# Altium PCB PCB2.PcbDoc
Units mil, origin at the board's own origin, x right, y up, seen from the top; angles counter-clockwise.
Board outline 1920 x 2930 mil, 2 copper layers (Top Layer, Bottom Layer); 24 components, 26 nets, 175 pads, 3 vias.
Unrouted connection lines stored in the file: 2.
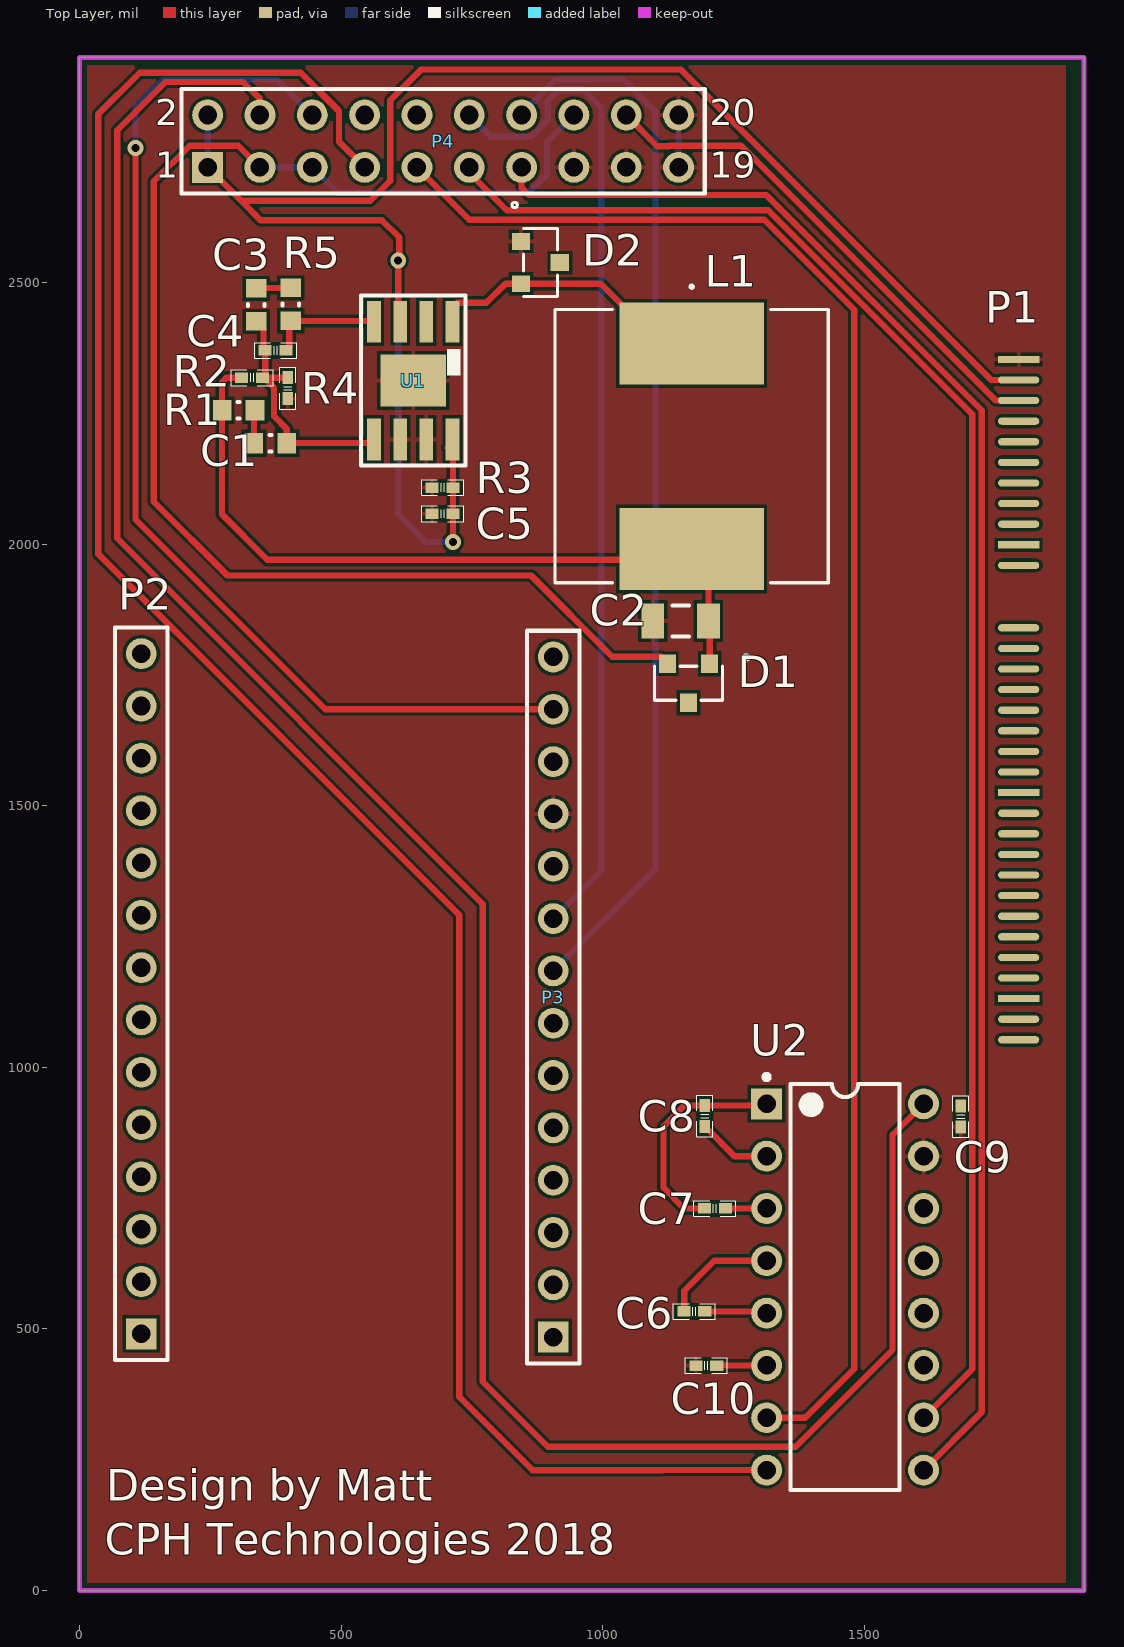
[diagram p0: Top Layer view]
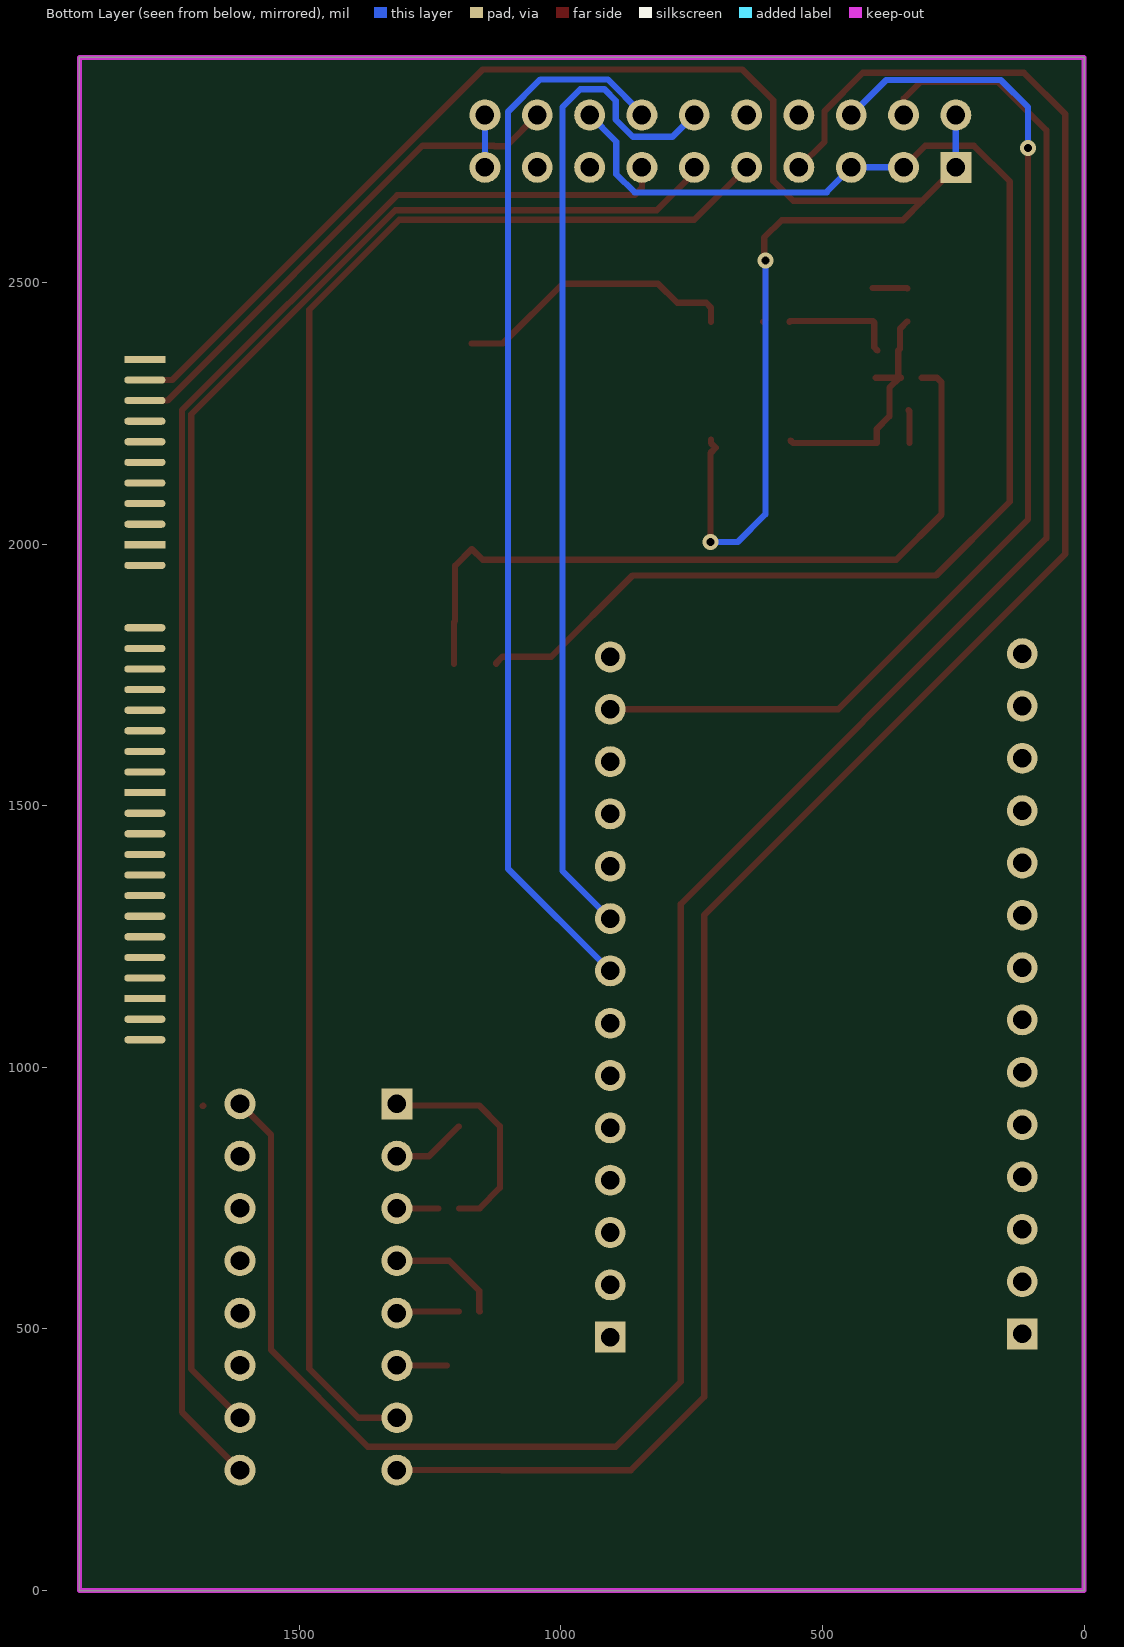
[diagram p1: Bottom Layer view, seen from below]

## Layer stack, top to bottom
Top Solder: solder mask 0.4, Solder Resist, Dk 3.5
Top Layer: signal copper 1.4
Dielectric 1: dielectric 12.6, FR-4, Dk 4.8
Bottom Layer: signal copper 1.4
Bottom Solder: solder mask 0.4, Solder Resist, Dk 3.5

## Board outline
0,0 1920,0 1920,2930 0,2930

## Design rules (kind name [scope] priority, off if disabled: settings)
BoardOutlineClearance [All] p1: gap=15 ignorepadtopadclearanceinfootprint=FALSE
Clearance [All] p1: gap=6 ignorepadtopadclearanceinfootprint=FALSE except(0: Arc-Hole Track-Hole SMDPad-Hole THPad-Hole Via-Hole Fill-Hole Poly-Hole Region-Hole Text-Hole)
ComponentClearance [All] p1: gap=1 collisioncheckmode=3 verticalgap=1 showdistances=FALSE
DiffPairsRouting [All] p1: maxlimit=393.7 minlimit=6 mostfreqgap=8 toplayer_minwidth=6 toplayer_maxwidth=15 toplayer_prefwidth=8 bottomlayer_minwidth=6 bottomlayer_maxwidth=15 bottomlayer_prefwidth=8 maxuncoupledlength=500
HoleSize [All] p1: absolutevalues=TRUE maxlimit=265 minlimit=13 maxpercent=80.000 minpercent=20.000
HoleToHoleClearance [All] p1: gap=10 allowstackedmicrovias=FALSE
MinimumAnnularRing [All] p1: minimumring=7
MinimumSolderMaskSliver [All] p1: minsoldermaskwidth=0
PlaneClearance [All] p1: clearance=10
PlaneConnect [All] p1: planeconnectstyle=Direct reliefexpansion=16 reliefentries=4 reliefconductorwidth=6 reliefairgap=6
PolygonConnect [All] p1: connectstyle=Relief reliefconductorwidth=8 reliefentries=4 polygonreliefangle="90 Angle" airgapwidth=6
RoutingCorners [All] p1: cornerstyle=45-Degree minsetback=49.21 maxsetback=49.21
RoutingVias [All] p1: holewidth=15 width=30 viastyle="Through Hole" minholewidth=13 minwidth=27 maxholewidth=100 maxwidth=114
SilkToSilkClearance [All] p1: silktosilkclearance=0
SilkToSolderMaskClearance [IsPad] p1: minsilkscreentomaskgap=6 clearancetoexposedcopper=TRUE
SolderMaskExpansion [All] p1: expansion=2.95
Width [All] p1: maxlimit=400 minlimit=6 preferedwidth=8
20 further rules are at their usual default settings.

## Classes and differential pairs
component class BoardPower: C1 C2 C3 C4 C5 D1 D2 L1 P1 R1 R2 R3 R4 R5 U1
component class Master: P2 P3
component class Serial: C6 C7 C8 C9 C10 U2

## Components (designator, comment, footprint, x,y, rotation, side; value= is the part's Value field where it differs from the comment)
C1 "CAP_2" 0603 365,2193 r0 top value=4.7nF
C2 "Cap" C1206 1149,1853 r0 top value=22uF
C3 "CAP_1_17" 0603 338,2457 r270 top value=15nF
C4 "CAP_1_16" 0402 375,2370 r180 top value=150pF
C5 "CAP_1_21_3" 0402 694,2058 r0 top value=1uF
C6 "CAP_1_21_4" 0402 1175.1,533.36 r0 top value=1uF
C7 "CAP_1_21_4" 0402 1214.47,730.21 r0 top value=1uF
C8 "CAP_1_21_4" 0402 1195.1,907.06 r270 top value=1uF
C9 "CAP_1_21_4" 0402 1684.21,906 r90 top value=1uF
C10 "CAP_1_21_4" 0402 1198,430 r0 top value=1uF
D1 "SCHOTTKY DIODE" SOT-23 1164,1734 r180 top
D2 "SCHOTTKY DIODE" SOT-23 881,2538 r270 top
L1 "INDUCTOR" IND_BOURNS_SRR12 1170,2187 r270 top value=27uH
P1 "PCIE-064-02-F-D-EMS2_1" PCIE-064-02-F-D-EMS2 1795,2353 r270 top
P2 "Header 14" HDR1X14 118.11,490.55 r90 top
P3 "Header 14" HDR1X14 905.51,484.25 r90 top
P4 "Header 10X2" HDR2X10 245,2720 r0 top
R1 "RES_9" 0603 304,2256 r180 top value=100
R2 "RES_38" 0402 330,2318 r180 top value=4.99K
R3 "RES_11" 0402 694,2108 r180 top value=100K
R4 "RES_49" 0402 398,2298 r90 top value=680
R5 "RES_32" 0603 404,2458 r90 top value=3.4k
U1 "L7986ATR" L7986ATR 637.97,2312.46 r270 top
U2 "MAX232N" N0016A 1463.21,580.21 r0 top

## Footprints (in the part's own frame and the unit in brackets; to place one, negate y for a bottom-side part, rotate by r counter-clockwise, add the part's x,y. Pads: shape width x height; smd on the part's side, far side on the other; paste and mask are expansions set on the pad)
0402 [mil] "0402"
  rect 25x20 smd mask+2: 1(-20,0) 2(20,0)
  silkscreen extent -40,-15 40,15, body extent -20,-10 20,10, height 16
0603 [mm] "Body 1.6x0.8mm, Height 0.55mm, IPC Medium Density"
  rect 0.9x1 smd: 1(-0.8,0) 2(0.8,0)
  silkscreen extent -0.05,-0.4 0.05,0.4, body extent -0.87,-0.48 0.88,0.47, height 0.55
C1206 [mm] "Chip Capacitor, Body 3.2x1.6mm, IPC High Density"
  rect 1.1x1.7 smd: 1(-1.35,0) 2(1.35,0)
  silkscreen extent -0.4,-0.75 0.4,0.75, body extent -1.7,-0.9 1.7,0.9, height 1.3
HDR1X14 [mm] "Connector; Header; 14 Position"
  rect 1.5x1.5 hole 0.9: 1(0,0)
  round 1.5 hole 0.9: 2(2.54,0) 3(5.08,0) 4(7.62,0) 5(10.16,0) 6(12.7,0) 7(15.24,0) 8(17.78,0) 9(20.32,0) 10(22.86,0) 11(25.4,0) 12(27.94,0) 13(30.48,0) 14(33.02,0)
  silkscreen extent -1.27,-1.27 34.29,1.27
HDR2X10 [mm] "Connector; Header; 10x2 Position"
  rect 1.5x1.5 hole 0.9: 1(0,0)
  round 1.5 hole 0.9: 2(0,2.54) 3(2.54,0) 4(2.54,2.54) 5(5.08,0) 6(5.08,2.54) 7(7.62,0) 8(7.62,2.54) 9(10.16,0) 10(10.16,2.54) 11(12.7,0) 12(12.7,2.54) 13(15.24,0) 14(15.24,2.54) 15(17.78,0) 16(17.78,2.54) 17(20.32,0) 18(20.32,2.54) 19(22.86,0) 20(22.86,2.54)
  silkscreen extent -1.27,-1.27 24.13,3.81
IND_BOURNS_SRR12 [mil]
  rect 157x276 smd paste+0 mask+0: 1(-196.5,0) 2(196.5,0)
  silkscreen extent -308,-261 261,261, body extent 0,0 10,10, height 10
L7986ATR [mil] "L7986ATR"
  rect 80x26 smd: 1(-112.5,75) 2(-112.5,25) 3(-112.5,-25) 4(-112.5,-75) 5(112.46,-74.97) 6(112.46,-24.97) 7(112.46,25.03) 8(112.46,75.03)
  rect 100x126 smd paste-1000: 9(0,0)
  silkscreen extent -163,-100 162,100, body extent -151,-98 151,98, height 85
N0016A [mm] "DIP, 16-Leads, Body 19.7x6.6mm, Pitch 2.54mm"
  rect 1.5x1.5 hole 0.9: 1(-3.81,8.89)
  round 1.5 hole 0.9: 2(-3.81,6.35) 3(-3.81,3.81) 4(-3.81,1.27) 5(-3.81,-1.27) 6(-3.81,-3.81) 7(-3.81,-6.35) 8(-3.81,-8.89) 9(3.81,-8.89) 10(3.81,-6.35) 11(3.81,-3.81) 12(3.81,-1.27) 13(3.81,1.27) 14(3.81,3.81) 15(3.81,6.35) 16(3.81,8.89)
  silkscreen extent -3.93,-9.85 2.65,10.31, body extent -3.95,-9.85 3.95,9.85, height 5.08
PCIE-064-02-F-D-EMS2 [mm]
  rect 0.35x2 smd: A1(0,0) A10(9,0) A20(21.032,0) A30(31.032,0)
  oval 0.35x2 smd: A2(1,0) A3(2,0) A4(3,0) A5(4,0) A6(5,0) A7(6,0) A8(7,0) A9(8,0) A11(10,0) A12(13.032,0) A13(14.032,0) A14(15.032,0) A15(16.032,0) A16(17.032,0) A17(18.032,0) A18(19.032,0) A19(20.032,0) A21(22.032,0) A22(23.032,0) A23(24.032,0) A24(25.032,0) A25(26.032,0) A26(27.032,0) A27(28.032,0) A28(29.032,0) A29(30.032,0) A31(32.032,0) A32(33.032,0)
  rect 0.35x2 smd far side: B1(0,0) B10(9,0) B20(21.032,0) B30(31.032,0)
  oval 0.35x2 smd far side: B2(1,0) B3(2,0) B4(3,0) B5(4,0) B6(5,0) B7(6,0) B8(7,0) B9(8,0) B11(10,0) B12(13.032,0) B13(14.032,0) B14(15.032,0) B15(16.032,0) B16(17.032,0) B17(18.032,0) B18(19.032,0) B19(20.032,0) B21(22.032,0) B22(23.032,0) B23(24.032,0) B24(25.032,0) B25(26.032,0) B26(27.032,0) B27(28.032,0) B28(29.032,0) B29(30.032,0) B31(32.032,0) B32(33.032,0)
SOT-23 [mil]
  rect 32x35 smd paste+0 mask+0: 1(-40.35,-37.2) 2(40.35,-37.2) 3(0,37.2)
  silkscreen extent -115,-54 65,33, body extent 0,0 10,10, height 10

## Part data
C1: "4.7nF 10% 50V", Capacitance=4.7nF, Case/Package=0603, Case Code (Metric)=1608, Dielectric=C0G, Manufacturer=Samsung, Manufacturer Part Number=CL10B472KB8NNNC, Max Operating Temperature=125°C, Min Operating Temperature=-55°C, Supplier Part Number 1=1276-1098-1-ND, Tolerance=10%, Voltage=50V, Case Code (Imperial)=0603, ComponentLink1Description=https://www.verical.com/server-webapp/html/getDatasheet?partID=359559, ComponentLink1URL=https://www.verical.com/server-webapp/html/getDatasheet?partID=359559, ComponentLink2Description=https://media.digikey.com/pdf/Data%20Sheets/Samsung%20PDFs/CL_Series_MLCC_ds.pdf, ComponentLink2URL=https://media.digikey.com/pdf/Data%20Sheets/Samsung%20PDFs/CL_Series_MLCC_ds.pdf, ComponentLink3Description=http://www1.futureelectronics.com/doc/SAMSUNG%20PASSIVE/CL05B104KQ5NNNC.pdf, ComponentLink3URL=http://www1.futureelectronics.com/doc/SAMSUNG%20PASSIVE/CL05B104KQ5NNNC.pdf, ComponentLink4Description=https://www.distrelec.biz/Web/Downloads/_e/ng/MLCC_CatalogDownload2013_ENG.pdf?mime=application%2Fpdf, ComponentLink4URL=https://www.distrelec.biz/Web/Downloads/_e/ng/MLCC_CatalogDownload2013_ENG.pdf?mime=application%2Fpdf, ComponentLink5Description=https://produktinfo.conrad.com/datenblaetter/450000-474999/457744-da-01-en-VS_KONDENSATOR_0603.pdf, ComponentLink5URL=https://produktinfo.conrad.com/datenblaetter/450000-474999/457744-da-01-en-VS_KONDENSATOR_0603.pdf, Contact Plating=Tin, Depth=0.8mm, Height=0.8mm, Lead Free="Lead Free", Length=1.6mm, Material=Ceramic, Mount="Surface Mount", Packaging="Tape and Reel", Pricing 1="1=0.1, 10=0.036, 100=0.0162, 500=0.01156, 1000=0.00908 (USD)", Radiation Hardening=No, Stock 1=40000, Supplier 1=Digi-Key, Thickness=0.035inch, Voltage Rating=50V, Voltage Rating (DC)=50V, Width=0.031inch
C2: "Capacitor", Capacitance=22uF, Case/Package=1206, Case Code (Metric)=3216, Dielectric Material=Ceramic, Manufacturer=TDK, Manufacturer Part Number=C3216JB1V226M160AC, Max Operating Temperature=85°C, Min Operating Temperature=-25°C, Package Quantity=2000, Supplier Part Number 1=445-11739-1-ND, Tolerance=20%, Voltage Rating=35V, Case Code (Imperial)=1206, Composition=Ceramic, Height=1.6mm, LatestRevisionDate=17-Jul-2002, LatestRevisionNote="Re-released for DXP Platform.", Lead Free="Lead Free", Length=0.126inch, Mount="Surface Mount", PackageDescription="Radial Cap, Thru-Hole; 2 Leads; 0.3 in Pin Spacing", PackageReference=RAD-0.3, Packaging="Tape and Reel", Pricing 1="1 = 1.20000, 10 = 0.94900, 100 = 0.71160, 500 = 0.53762, 1000 = 0.47438 (USD)", Published=8-Jun-2000, Publisher="Altium Limited", RoHS=Yes, Stock 1=587, Supplier 1=Digi-Key, Termination=SMD/SMT, Thickness=0.069inch, Voltage Rating (DC)=35V, Width=0.063inch
C3: "15nF 10% 50V", Capacitance=12nF, Case/Package=0603, Case Code (Metric)=1608, Dielectric=X7R, Dielectric Material=Ceramic, Manufacturer=KEMET, Manufacturer Part Number=C0603C123K1RACTU, Max Operating Temperature=125°C, Min Operating Temperature=-55°C, Package Quantity=1, Supplier Part Number 1=399-3473-1-ND, Tolerance=10%, Voltage=50V, Voltage Rating=100V, Case Code (Imperial)=0603, Depth=0.8mm, Height=0.8mm, Length=1.6mm, Mount="Surface Mount", Packaging="Tape and Reel", Pricing 1="1=0.39, 10=0.27, 100=0.1617, 500=0.1213, 1000=0.10243 (USD)", Stock 1=40000, Supplier 1=Digi-Key, Termination=SMD/SMT, Thickness=0.034inch, Voltage Rating (DC)=100V, Width=0.8mm
C4: "150pF 5% 50V", Manufacturer="AVX Corporation", Manufacturer Part Number=04025A151JAT2A, Operating Temperature="-55°C ~ 125°C", Package / Case="0402 (1005 Metric)", Ratings=-, Supplier Part Number 1=478-1084-1-ND, Temperature Coefficient="C0G, NP0", Tolerance=±5%, Voltage - Rated=50V, Applications="General Purpose", Category=Capacitors, ComponentLink1Description=http://datasheets.avx.com/C0GNP0-Dielectric.pdf, ComponentLink1URL=http://datasheets.avx.com/C0GNP0-Dielectric.pdf, Features=-, Height - Seated (Max)=-, Lead Spacing=-, Lead Style=-, Mounting Type="Surface Mount, MLCC", Notification="Current market demand for these product types have resulted in fluctuating and extending lead times. Lead times may differ.", Packaging="Cut Tape (CT)", Part Status=Active, Pricing 1="1=0.19, 10=0.133, 100=0.0625, 500=0.04384, 1000=0.0363, 2500=0.03378, 5000=0.03091 (USD)", RoHS="RoHS Compliant", Size / Dimension="0.039\" L x 0.020\" W (1.00mm x 0.50mm)", Stock 1=55500, Supplier 1=Digi-Key, Thickness (Max)="0.022\" (0.56mm)"
C5: "1uF 10% 50V", Manufacturer="Samsung Electro-Mechanics", Manufacturer Part Number=CL05A105KA5NQNC, Operating Temperature="-55°C ~ 85°C", Package / Case="0402 (1005 Metric)", Ratings=-, Supplier Part Number 1=1276-1445-1-ND, Temperature Coefficient=X5R, Tolerance=±10%, Voltage - Rated=25V, Applications="General Purpose", Category=Capacitors, ComponentLink1Description=http://www.samsungsem.com/kr/support/product-search/mlcc/CL05A105KA5NQNC.jsp, ComponentLink1URL=http://www.samsungsem.com/kr/support/product-search/mlcc/CL05A105KA5NQNC.jsp, Features=-, Height - Seated (Max)=-, Lead Spacing=-, Lead Style=-, Mounting Type="Surface Mount, MLCC", Notification="Current market demand for these product types have resulted in fluctuating and extending lead times. Lead times may differ.", Packaging="Cut Tape (CT)", Part Status=Active, Pricing 1="1=0.33, 10=0.222, 100=0.1151, 500=0.08052, 1000=0.07188, 2500=0.069, 5000=0.06325 (USD)", RoHS="RoHS Compliant", Size / Dimension="0.039\" L x 0.020\" W (1.00mm x 0.50mm)", Stock 1=47496, Supplier 1=Digi-Key, Thickness (Max)="0.022\" (0.55mm)"
C6 C7 C8 C9 C10: "1uF 10% 10V", Capacitance=1uF, Case/Package=0402, Case Code (Metric)=1005, Dielectric=X5R, Manufacturer=Samsung, Manufacturer Part Number=CL05A105MP5NNNC, Max Operating Temperature=85°C, Min Operating Temperature=-55°C, Package Quantity=1, Supplier Part Number 1=1276-1448-1-ND, Tolerance=10%, Voltage=10V, Case Code (Imperial)=0402, ComponentLink1Description=https://media.digikey.com/pdf/Data%20Sheets/Samsung%20PDFs/CL_Series_MLCC_ds.pdf, ComponentLink1URL=https://media.digikey.com/pdf/Data%20Sheets/Samsung%20PDFs/CL_Series_MLCC_ds.pdf, Depth=0.5mm, Height=0.5mm, Lead Free="Lead Free", Length=1mm, Mount="Surface Mount", Packaging="Tape and Reel", Pricing 1="1=0.1, 10=0.031, 100=0.014, 500=0.01002, 1000=0.00787, 2500=0.00716, 5000=0.00658 (USD)", Radiation Hardening=No, Stock 1=100000, Supplier 1=Digi-Key, Thickness=0.022inch, Voltage Rating=10V, Voltage Rating (DC)=10V, Width=0.02inch
D1 D2: Average Rectified Current=200mA, Capacitance=10pF, Case/Package=SOT, Forward Voltage=800mV, Manufacturer=Diodes, Manufacturer Part Number=BAT54-7-F, Max Forward Surge Current (Ifsm)=600mA, Max Operating Temperature=150°C, Max Power Dissipation=200mW, Max Repetitive Reverse Voltage (Vrrm)=30V, Max Reverse Leakage Current=100uA, Max Surge Current=75A, Min Operating Temperature=-65°C, Package Quantity=3000, Peak Reverse Current=2uA, Supplier Part Number 1=BAT54-FDICT-ND, ComponentLink1Description=http://www.jameco.com/Jameco/Products/ProdDS/1539180.pdf, ComponentLink1URL=http://www.jameco.com/Jameco/Products/ProdDS/1539180.pdf, ComponentLink2Description=https://www.verical.com/server-webapp/html/getDatasheet?partID=141352, ComponentLink2URL=https://www.verical.com/server-webapp/html/getDatasheet?partID=141352, ComponentLink3Description=http://www.st.com/web/en/resource/technical/document/datasheet/CD00002082.pdf, ComponentLink3URL=http://www.st.com/web/en/resource/technical/document/datasheet/CD00002082.pdf, ComponentLink4Description=http://www.st.com/content/ccc/resource/technical/document/datasheet/group1/48/52/98/4d/1d/c7/40/65/CD00002082/files/CD00002082.pdf/jcr:content/translations/en.CD00002082.pdf, ComponentLink4URL=http://www.st.com/content/ccc/resource/technical/document/datasheet/group1/48/52/98/4d/1d/c7/40/65/CD00002082/files/CD00002082.pdf/jcr:content/translations/en.CD00002082.pdf, ComponentLink5Description=http://www.st.com/st-web-ui/static/active/en/resource/technical/document/datasheet/CD00002082.pdf, ComponentLink5URL=http://www.st.com/st-web-ui/static/active/en/resource/technical/document/datasheet/CD00002082.pdf, ComponentLink6Description=http://datasheet.iiic.cc/stmicroelectronics/STPS3L40S.pdf, ComponentLink6URL=http://datasheet.iiic.cc/stmicroelectronics/STPS3L40S.pdf, Contact Plating=Matte,Tin, Current Rating=200mA, Element Configuration=Single, Forward Current=200mA, Height=1mm, Lead Free="Lead Free", Length=2.9mm, Max Reverse Voltage (DC)=30V, Mount="Surface Mount", Number of Pins=3, Output Current=200mA, Packaging="Tape and Reel", Peak Non-Repetitive Surge Current=600mA, Polarity=Standard, Power Dissipation=200mW, Power Rating=200mW, Pricing 1="1=0.13, 10=0.117, 100=0.0634, 500=0.03904, 1000=0.02662 (GBP)", Pricing 2="1=0.84, 10=0.742, 100=0.5689, 500=0.4497, 1000=0.35976 (USD)", Radiation Hardening=No, REACH SVHC="No SVHC", Reverse Recovery Time=5ns, Stock 1=396335, Stock 2=24, Supplier 1=Digi-Key, Supplier 2=Digi-Key, Supplier Part Number 2=497-4673-1-ND, Termination=SMD/SMT, Voltage Rating (DC)=30V, Weight=0.000282oz, Width=1.3mm
L1: library part Inductor, "Inductor", Case/Package=Nonstandard, Current Rating=3A, DC Resistance (DCR)=48mR, Frequency=6.5MHz, Inductance=27uh, Inductance Tolerance=20%, Manufacturer=Bourns, Manufacturer Part Number=SRR1208-270ML, Max Operating Temperature=125°C, Min Operating Temperature=-40°C, Package Quantity=400, Resistance=48MR, Saturation Current=4.3A, Supplier Part Number 1=SRR1208-270MLCT-ND, Test Frequency=1kHz, Code_IEC=1005, Code_JEITA=0402, ComponentLink1Description=https://www.bourns.com/docs/Product-Datasheets/SRR1208.pdf, ComponentLink1URL=https://www.bourns.com/docs/Product-Datasheets/SRR1208.pdf, ComponentLink2Description=http://www.bourns.com/pdfs/srr1208.pdf, ComponentLink2URL=http://www.bourns.com/pdfs/srr1208.pdf, ComponentLink3Description=http://www.farnell.com/datasheets/1483756.pdf, ComponentLink3URL=http://www.farnell.com/datasheets/1483756.pdf, ComponentLink4Description=http://www.mouser.com/ds/2/54/rr1208-777886.pdf, ComponentLink4URL=http://www.mouser.com/ds/2/54/rr1208-777886.pdf, ComponentLink5Description=http://www.produktinfo.conrad.com/datenblaetter/1000000-1099999/001056595-da-01-en-MAG_ABGE_L_IND_SRR1208_270ML_27UH_20_.pdf, ComponentLink5URL=http://www.produktinfo.conrad.com/datenblaetter/1000000-1099999/001056595-da-01-en-MAG_ABGE_L_IND_SRR1208_270ML_27UH_20_.pdf, Composition=Wirewound, Core Material=Ferrite, DC Current=3A, Depth=13mm, Height=8.5mm, Height - Seated (Max)=0.335inch, LatestRevisionDate=29-May-2009, LatestRevisionNote="IPC-7351 Footprint Added.", Length=12.7mm, Material=Steel, Max DC Current=3A, Military Standard=Not, Mount="Surface Mount", PackageDescription="Chip Inductor", PackageReference=0402-A, Packaging="Tape and Reel", Pricing 1="1 = 1.13000, 10 = 1.04700, 100 = 0.75670 (USD)", Published=8-Jun-2000, Publisher="Altium Limited", Q Factor=23, Radiation Hardening=No, REACH SVHC="No SVHC", RMS Current (Irms)=3A, RoHS=Yes, Self Resonant Frequency=6.5MHz, Shielding=Shielded, Stock 1=16310, Supplier 1=Digi-Key, Termination=SMD/SMT, Tolerance=20%, Width=12.7mm
P2 P3: "Header, 14-Pin", LatestRevisionDate=17-Jul-2002, LatestRevisionNote="Re-released for DXP Platform.", Publisher="Altium Limited"
P4: "Header, 10-Pin, Dual row", LatestRevisionDate=17-Jul-2002, LatestRevisionNote="Re-released for DXP Platform.", Publisher="Altium Limited"
R1: "RES 100 0.1W ±1% 0603 (1608)", Manufacturer="Panasonic Electronic Components", Manufacturer Part Number=ERA-3AEB101V, Operating Temperature="-55°C ~ 155°C", Package / Case="0603 (1608 Metric)", Power (Watts)="0.1W, 1/10W", Supplier Device Package=0603, Supplier Part Number 1=P100DBCT-ND, Temperature Coefficient=±25ppm/°C, Tolerance=±0.1%, Category=Resistors, ComponentLink1Description=https://industrial.panasonic.com/cdbs/www-data/pdf/RDM0000/AOA0000C307.pdf, ComponentLink1URL=https://industrial.panasonic.com/cdbs/www-data/pdf/RDM0000/AOA0000C307.pdf, Composition="Thin Film", Failure Rate=-, Features="Automotive AEC-Q200", Height - Seated (Max)="0.022\" (0.55mm)", Packaging="Cut Tape (CT)", Part Status=Active, Pricing 1="1=0.35, 10=0.3, 100=0.1172, 1000=0.04906, 2500=0.04498 (USD)", RoHS="RoHS Compliant", Size / Dimension="0.063\" L x 0.031\" W (1.60mm x 0.80mm)", Stock 1=413728, Supplier 1=Digi-Key
R2: "RES 4.99K ±1% 0603 (1608)", Manufacturer="Panasonic Electronic Components", Manufacturer Part Number=ERA-2AEB4991X, Operating Temperature="-55°C ~ 155°C", Package / Case="0402 (1005 Metric)", Power (Watts)="0.063W, 1/16W", Supplier Device Package=0402, Supplier Part Number 1=P4.99KDCCT-ND, Temperature Coefficient=±25ppm/°C, Tolerance=±0.1%, Category=Resistors, ComponentLink1Description=https://industrial.panasonic.com/cdbs/www-data/pdf/RDM0000/AOA0000C307.pdf, ComponentLink1URL=https://industrial.panasonic.com/cdbs/www-data/pdf/RDM0000/AOA0000C307.pdf, Composition="Thin Film", Failure Rate=-, Features="Automotive AEC-Q200", Height - Seated (Max)="0.016\" (0.40mm)", Packaging="Cut Tape (CT)", Part Status=Active, Pricing 1="1=0.45, 10=0.321, 100=0.1283, 1000=0.06322, 2500=0.05858, 5000=0.053 (USD)", RoHS="RoHS Compliant", Size / Dimension="0.039\" L x 0.020\" W (1.00mm x 0.50mm)", Stock 1=434290, Supplier 1=Digi-Key
R3: "RES 100K 0.1W ±1% 0603 (1608 Metric)", Manufacturer="Vishay Dale", Manufacturer Part Number=TNPW0402100KBEED, Operating Temperature="-55°C ~ 155°C", Package / Case="0402 (1005 Metric)", Power (Watts)="0.1W, 1/10W", Supplier Device Package=0402, Supplier Part Number 1=TNP100KDACT-ND, Temperature Coefficient=±25ppm/°C, Tolerance=±0.1%, Category=Resistors, ComponentLink1Description=http://www.vishay.com/docs/28758/tnpw_e3.pdf, ComponentLink1URL=http://www.vishay.com/docs/28758/tnpw_e3.pdf, Composition="Thin Film", Failure Rate=-, Features="Anti-Sulfur, Automotive AEC-Q200, Moisture Resistant", Height - Seated (Max)="0.016\" (0.40mm)", Packaging="Cut Tape (CT)", Part Status=Active, Pricing 1="1=0.65, 10=0.462, 100=0.2402, 1000=0.12936, 2500=0.1276 (USD)", RoHS="RoHS Compliant", Size / Dimension="0.039\" L x 0.020\" W (1.00mm x 0.50mm)", Stock 1=177054, Supplier 1=Digi-Key
R4: "RES 680 ±1% 0603 (1608)", Manufacturer="Panasonic Electronic Components", Manufacturer Part Number=ERA-2AED681X, Operating Temperature="-55°C ~ 155°C", Package / Case="0402 (1005 Metric)", Power (Watts)="0.063W, 1/16W", Supplier Device Package=0402, Supplier Part Number 1=P680DECT-ND, Temperature Coefficient=±25ppm/°C, Tolerance=±0.5%, Category=Resistors, ComponentLink1Description=https://industrial.panasonic.com/cdbs/www-data/pdf/RDM0000/AOA0000C307.pdf, ComponentLink1URL=https://industrial.panasonic.com/cdbs/www-data/pdf/RDM0000/AOA0000C307.pdf, Composition="Thin Film", Failure Rate=-, Features="Automotive AEC-Q200", Height - Seated (Max)="0.016\" (0.40mm)", Packaging="Cut Tape (CT)", Part Status=Active, Pricing 1="1=0.22, 10=0.188, 100=0.0735, 1000=0.03077, 2500=0.0282, 5000=0.02564 (USD)", RoHS="RoHS Compliant", Size / Dimension="0.039\" L x 0.020\" W (1.00mm x 0.50mm)", Stock 1=23860, Supplier 1=Digi-Key
R5: "RES 3.4K ±1% 0603 (1608)", Case/Package=0603, Case Code (Metric)=1608, Manufacturer=Panasonic, Manufacturer Part Number=ERA3AEB3401V, Max Operating Temperature=155°C, Max Power Dissipation=100mW, Min Operating Temperature=-55°C, Package Quantity=1, Resistance=3.4kR, Supplier Part Number 1=P3.4KDBCT-ND, Temperature Coefficient=25ppm/°C, Voltage Rating=75V, Case Code (Imperial)=0603, ComponentLink1Description=http://uk.rs-online.com/webdocs/0eb1/0900766b80eb1d8c.pdf, ComponentLink1URL=http://uk.rs-online.com/webdocs/0eb1/0900766b80eb1d8c.pdf, ComponentLink2Description=http://industrial.panasonic.com/www-data/pdf/AOA0000/AOA0000CE26.pdf, ComponentLink2URL=http://industrial.panasonic.com/www-data/pdf/AOA0000/AOA0000CE26.pdf, ComponentLink3Description=http://www.farnell.com/datasheets/485442.pdf, ComponentLink3URL=http://www.farnell.com/datasheets/485442.pdf, Composition="Metal Film,Thin Film", Contact Plating=Tin, Depth=0.8mm, Features="Automotive AEC-Q200", Height=0.45mm, Lead Free="Lead Free", Length=1.6mm, Military Standard=Not, Mount="Surface Mount", Number of Pins=2, Number of Terminations=2, Packaging="Tape and Reel", Power Rating=100mW, Pricing 1="1=0.35, 10=0.3, 100=0.1172, 1000=0.04906, 2500=0.04498 (USD)", Radiation Hardening=No, REACH SVHC="No SVHC", Stock 1=33449, Supplier 1=Digi-Key, Voltage Rating (DC)=75V, Width=0.8mm
U1: "IC Switching Regulator 3A STEP-DOWN 8-HSOP", Supplier Part Number 1=497-12083-1-ND, Supplier 1=Digi-Key, Title=L7986TATR
U2: library part CMP-0299-00084-2, "Dual EIA-232 Driver / Receiver, 0 to 70 degC, 16-Pin PDIP (N), Pb-Free (RoHS)", Drivers Per Package=2, Supply Voltage(s)(V)=5, ComponentLink1Description="Manufacturer URL", ComponentLink1URL=www.ti.com, ComponentLink2Description=Datasheet, ComponentLink2URL=http://www.ti.com/general/docs/lit/getliterature.tsp?genericPartNumber=MAX232&fileType=pdf, ComponentLink3Description="Package Specification", ComponentLink3URL=http://www.ti.com/litv/pdf/mpdi002c, DatasheetVersion=SLLS047L, ESD HBM(kV)=+/-2, ICC(Max)(mA)=10, PackageDescription="16-Pin Plastic Dual-In-Line Package, Row Spacing 7.62 mm, Pitch 2.54 mm", PackageReference=N0016A, PackageVersion="revE, Dec-2002", Receivers Per Package=2, RS-232=TRUE, Single Supply=TRUE, SubFamily=RS-232

## Via types
v1: diameter 30, hole 15, Top Layer to Bottom Layer, 3 vias

## Nets (pads, with @x,y where several pads share a name; then routed paths per layer and width w, separated by ;. In a path a pad name is that pad's centre, name@x,y a point inside that pad or via, vN(x,y) a via of type N, cw(c..) or ccw(c..) an arc to the next point about the centre after c; other vN are vias at no path point)
GND: C2.1 C5.1 C9.1 C10.1 D2.1 P1.A1 P3.11 P4.15 P4.17 P4.19 P4.20 R3.2 R4.1 U1.6 U1.7 U1.9 U2.15 | length 100
  Bottom Layer w12: P4.19 P4.20
NetC1_1: C1.1 R1.1 | length 63.8
  Top Layer w12: C1.1 333.5,2254.01 R1.1
NetC1_2: C1.2 C3.2 C4.2 R2.1 R4.2 U1.5 | length 474.4
  Top Layer w12: C3.2 351.72,2411.79 351.72,2373.28 C4.2 355,2323 R2.1 R2.1@352.5,2318 ; R4.2 R2.1@352.5,2318 ; U1.5@561,2198 556,2193 C1.2 396,2193.5 396,2220 372,2244 372,2298.5 R2.1@352.5,2318
NetC2_2: C2.2 D1.1 L1.2 R1.2 R2.2 | length 1469.4
  Top Layer w12: R2.2 281,2318 272.5,2309.5 R1.2 272.5,2056.5 359,1970 1149.5,1970 L1.2 1202.15,1958.35 C2.2 1204.35,1850.8 D1.1
NetC3_1: C3.1 R5.2 | length 66.4
  Top Layer w12: C3.1 339,2489.5 R5.2
NetC4_1: C4.1 R5.1 U1.4 | length 219.8
  Top Layer w12: C4.1 401,2376 401,2423.5 R5.1 561.43,2426.5 U1.4
NetC5_2: C5.2 P1.A2 P4.1 P4.2 R3.1 U1.3 U1.8 | length 3426.8
  Top Layer w12: P4.1 309,2656 ; U1.3 609,2428.94 v1(609,2542) 611,2544 611,2586 578,2619 346,2619 309,2656 ; U1.8 713,2193 704,2184 714,2174 R3.1 C5.2 v1(714,2004) ; P1.A2 1742.37,2313.63 1149,2907 653,2907 594,2848 594,2694 556,2656 309,2656
  Bottom Layer w12: P4.1 P4.2 ; v1(609,2542) 609,2057 662,2004 v1(714,2004)
NetC6_1: C6.1 U2.4 | length 220.9
  Top Layer w12: C6.1 1155.73,533.99 1155.73,572.73 1213.21,630.21 U2.4
NetC6_2: C6.2 U2.5 | length 119.4
  Top Layer w12: C6.2 1310.06,533.36 U2.5
NetC7_1: C7.1 C8.1 U2.1 | length 427.4
  Top Layer w12: C7.1 1155.1,730.21 1155.1,730.84 1116.36,769.58 1116.36,887.69 1155.73,927.06 C8.1 1310.06,927.06 U2.1
NetC7_2: C7.2 U2.3 | length 78.7
  Top Layer w12: C7.2 U2.3
NetC8_2: C8.2 U2.2 | length 141.7
  Top Layer w12: C8.2 1251.95,830.21 U2.2
NetC9_2: C9.2 P4.4 U2.16 | length 4443.8
  Top Layer w12: P4.4 345,2851 313,2883 164,2883 72,2791 72,2011 771,1312 771,399 895,275 1369.06,275 1554,459.94 1554,871 U2.16 ; C9.2@1683.43,926.79 C9.2
NetC10_2: C10.2 U2.6 | length 95.3
  Top Layer w12: C10.2 1313,430 U2.6
NetD1_2: D1.2 P4.3 P4.5 P4.16 | length 2689.5
  Top Layer w12: P4.3 303.47,2761.53 210.5,2761.53 142,2693.03 142,2081 283,1940 863,1940 1018.3,1784.7 1111.65,1784.7 1123.65,1772.7 D1.2
  Bottom Layer w12: P4.3 P4.5 492,2673 492,2672 859,2672 894,2707 894,2769 P4.16
NetD2_2: D2.2 L1.1 U1.1 | length 550.2
  Top Layer w12: U1.1 712.97,2451.96 721.97,2460.96 777.61,2460.96 814.3,2497.65 D2.2 996.35,2497.65 1110.5,2383.5 L1.1
NetP1_3: P1.A3 P4.18 | length 976.9
  Top Layer w12: P4.18 1104.47,2760.53 1126.8,2760.53 1127.8,2761.53 1264.47,2761.53 1751.74,2274.26 P1.A3
NetP3_8: P3.8 P4.14 | length 2034.2
  Bottom Layer w12: P4.14 845,2822.83 910.17,2888 1039,2888 1101,2826 1101,1379.74 P3.8
NetP3_9: P3.9 P4.12 | length 1930.6
  Bottom Layer w12: P4.12 786.53,2778.47 862.2,2778.47 895,2811.27 895,2847.37 916.63,2869 963,2869 997,2835 997,1375.74 P3.9
NetP3_13: P3.13 P4.6 | length 2137.7
  Top Layer w8: P4.6@435.23,2810.23 P4.6
  Top Layer w12: v1(107,2757) 107,2047.25 470,1684.25 P3.13
  Bottom Layer w12: v1(107,2757) 107,2835 159,2887 378,2887 P4.6
NetP4_7: P4.7 U2.8 | length 4034.2
  Top Layer w12: P4.7 496,2769 496,2827.73 422.73,2901 115,2901 36,2822 36,1981 726,1291 726,370 866,230 1113.57,230 1113.79,230.21 U2.8
NetP4_8: P4.8
NetP4_9: P4.9 U2.7 | length 3180.7
  Top Layer w12: P4.9 745,2620 1309.09,2620 1481,2448.09 1481,424 1387.21,330.21 U2.7 U2.7@1313.21,331.54
NetP4_10: P4.10
NetP4_11: P4.11 U2.10 | length 3119.3
  Top Layer w12: P4.11 745,2709.57 816.57,2638 1316.54,2638 1706.21,2248.33 1706.21,423.21 U2.10
NetP4_13: P4.13 U2.9 | length 3165.9
  Top Layer w12: P4.13 845,2681 859,2667 1313,2667 1724.21,2255.79 1724.21,341.21 U2.9
pads on no net: D1.3 D2.3 P1.A4 P1.A5 P1.A6 P1.A7 P1.A8 P1.A9 P1.A10 P1.A11 P1.A12 P1.A13 P1.A14 P1.A15 P1.A16 P1.A17 P1.A18 P1.A19 P1.A20 P1.A21 P1.A22 P1.A23 P1.A24 P1.A25 P1.A26 P1.A27 P1.A28 P1.A29 P1.A30 P1.A31 P1.A32 P1.B1 P1.B2 P1.B3 P1.B4 P1.B5 P1.B6 P1.B7 P1.B8 P1.B9 P1.B10 P1.B11 P1.B12 P1.B13 P1.B14 P1.B15 P1.B16 P1.B17 P1.B18 P1.B19 P1.B20 P1.B21 P1.B22 P1.B23 P1.B24 P1.B25 P1.B26 P1.B27 P1.B28 P1.B29 P1.B30 P1.B31 P1.B32 P2.1 P2.2 P2.3 P2.4 P2.5 P2.6 P2.7 P2.8 P2.9 P2.10 P2.11 P2.12 P2.13 P2.14 P3.1 P3.2 P3.3 P3.4 P3.5 P3.6 P3.7 P3.10 P3.12 P3.14 U1.2 U2.11 U2.12 U2.13 U2.14

## Polygon pours and split planes (outlines as drawn)
GND on Top Layer "Top Layer-No Net" (solid, pour order 0): 5,5 1885,5 1885,2915 5,2915

## Keep-outs
Keep-Out Layer:
  the board outline again, w10

## Silkscreen, mask and mechanical layers (free items; w line width, h text height)
Top Overlay:
  text "Design by Matt" at 51,172 h60
  text "CPH Technologies 2018" at 48,68 h60

## Text inside footprints (layer, text, board x,y; h text height)
P4: Top Overlay "20" at 1205,2800 h50; Top Overlay "19" at 1205,2700 h50; Top Overlay "1" at 145,2700 h50; Top Overlay "2" at 145,2800 h50